# Altium PCB Controller_TRK_hv2.PcbDoc (part 1 of 2)
Units mm, origin at the board's own origin, x right, y up, seen from the top; angles counter-clockwise.
Board outline 95.06 x 95 mm, 2 copper layers (Top Layer, Bottom Layer); 179 components, 122 nets, 486 pads, 332 vias.
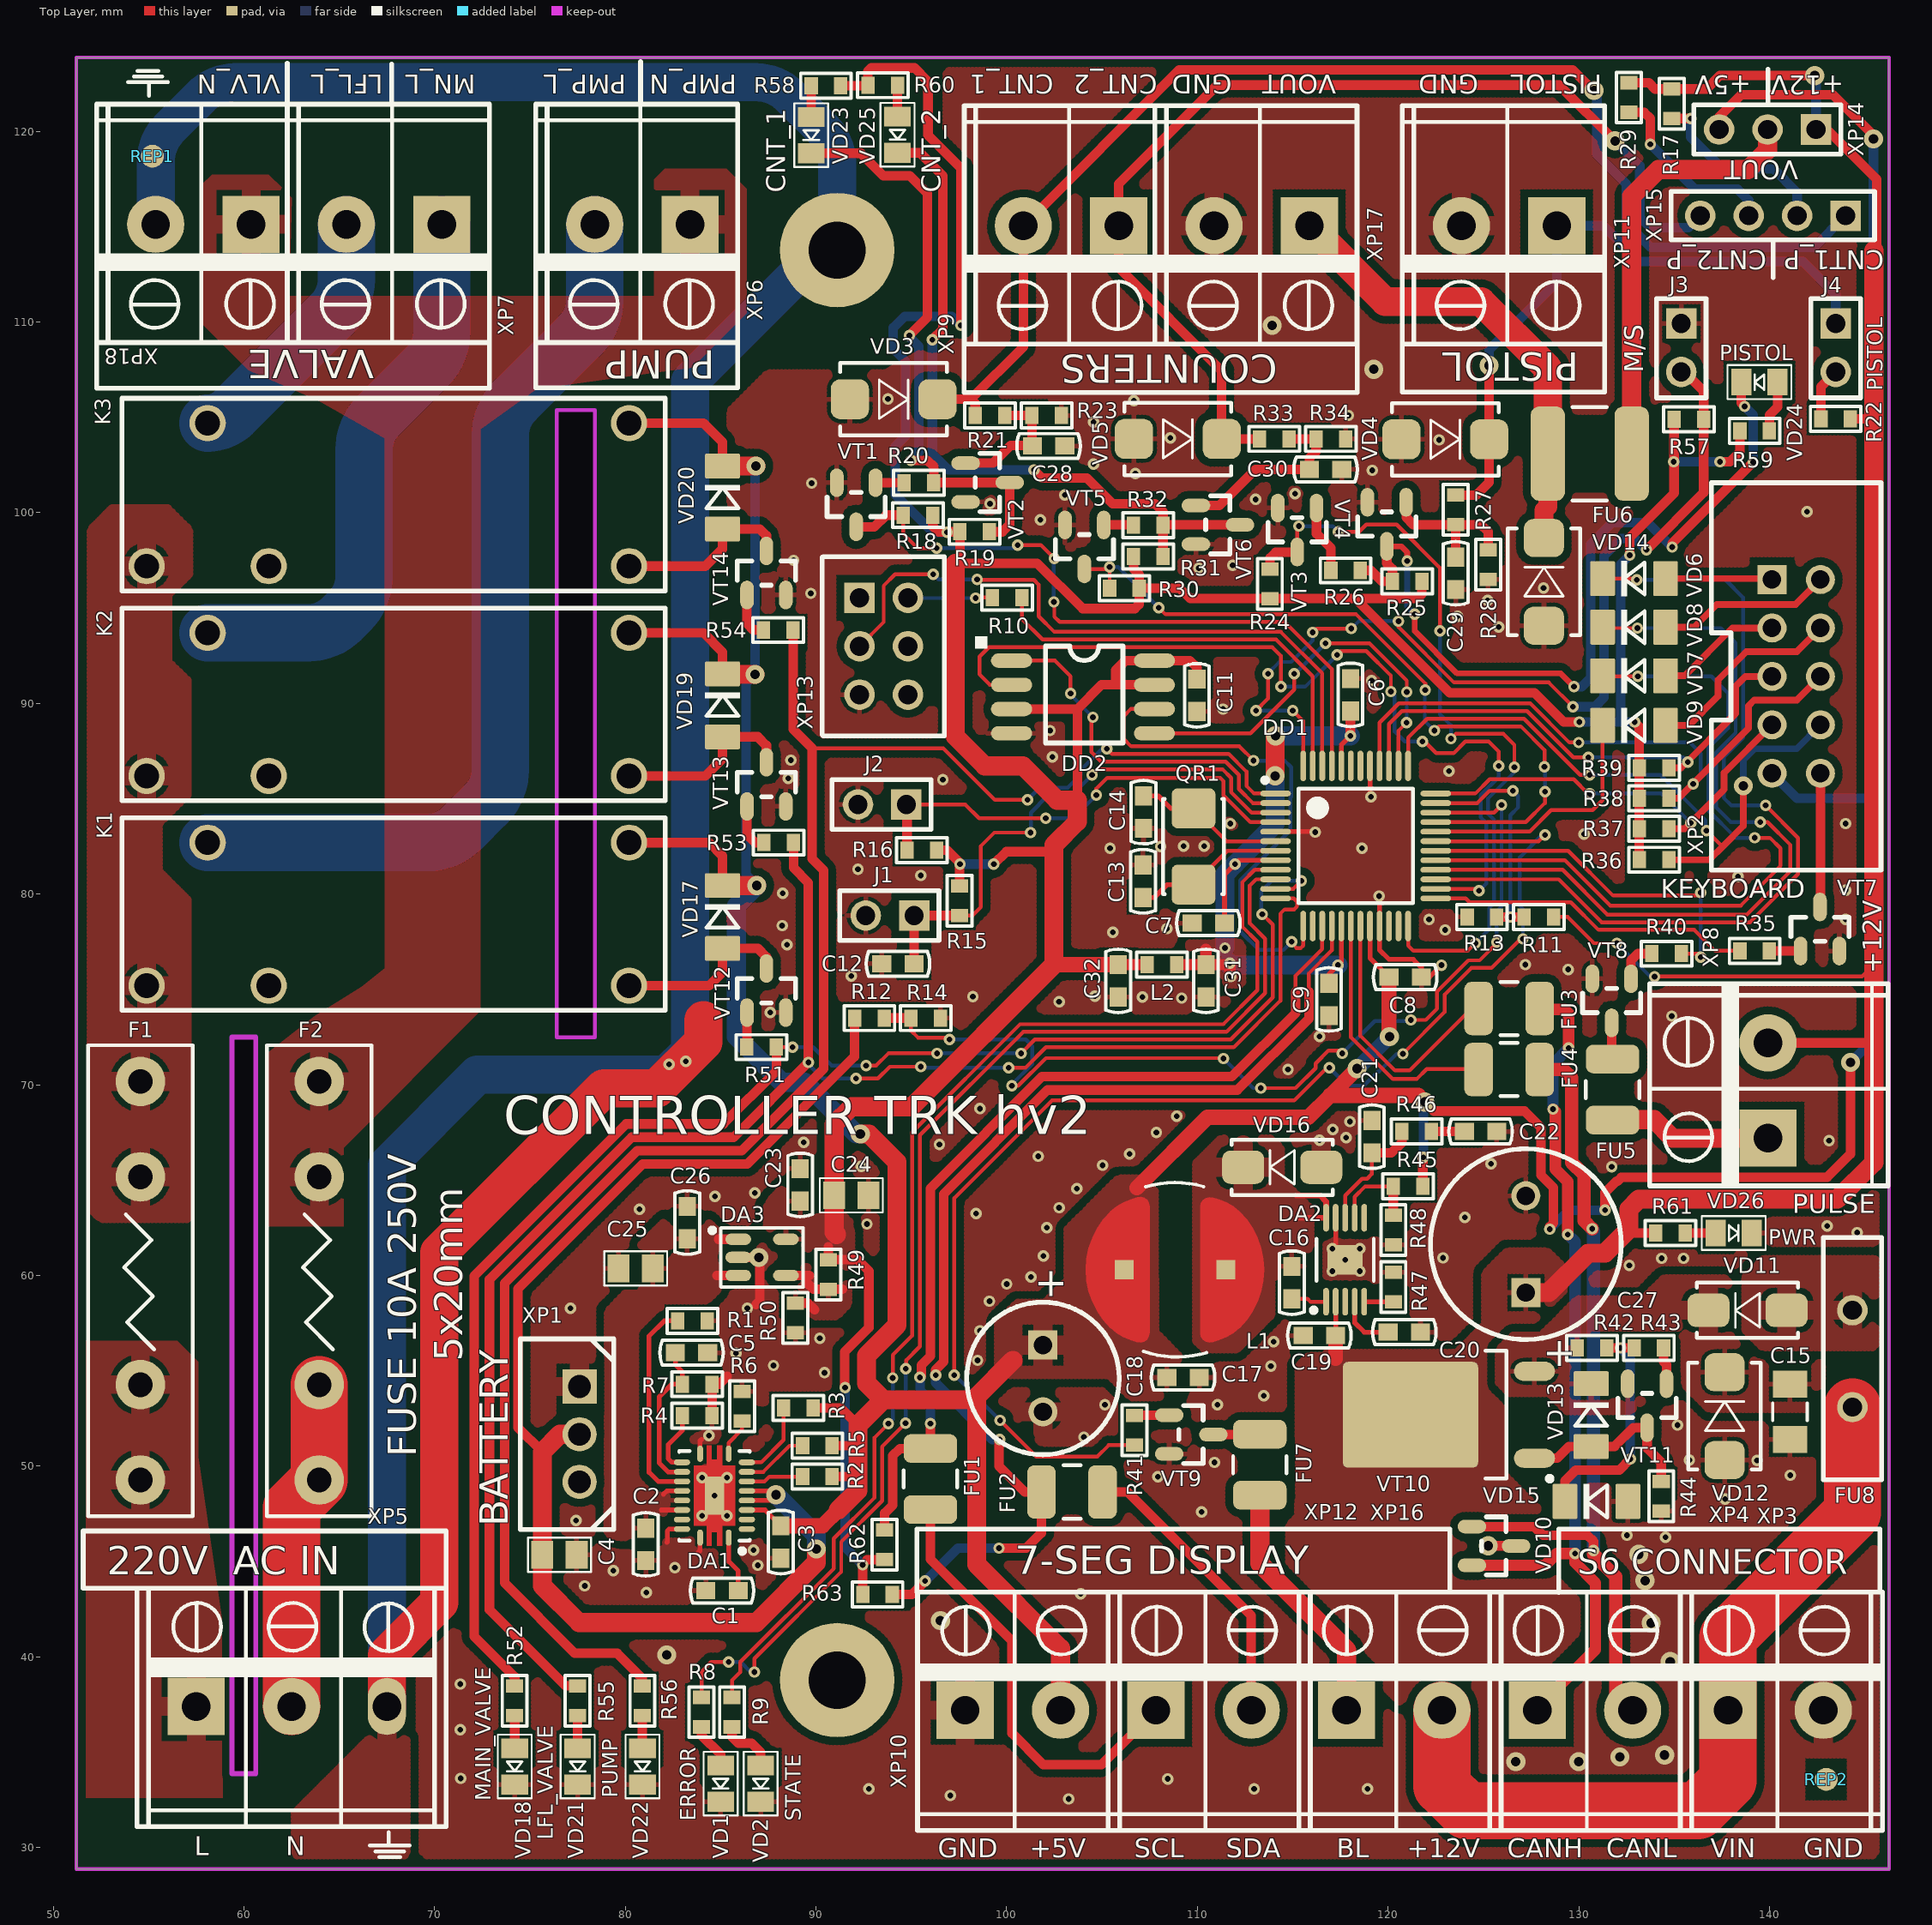
[diagram p0: Top Layer view]
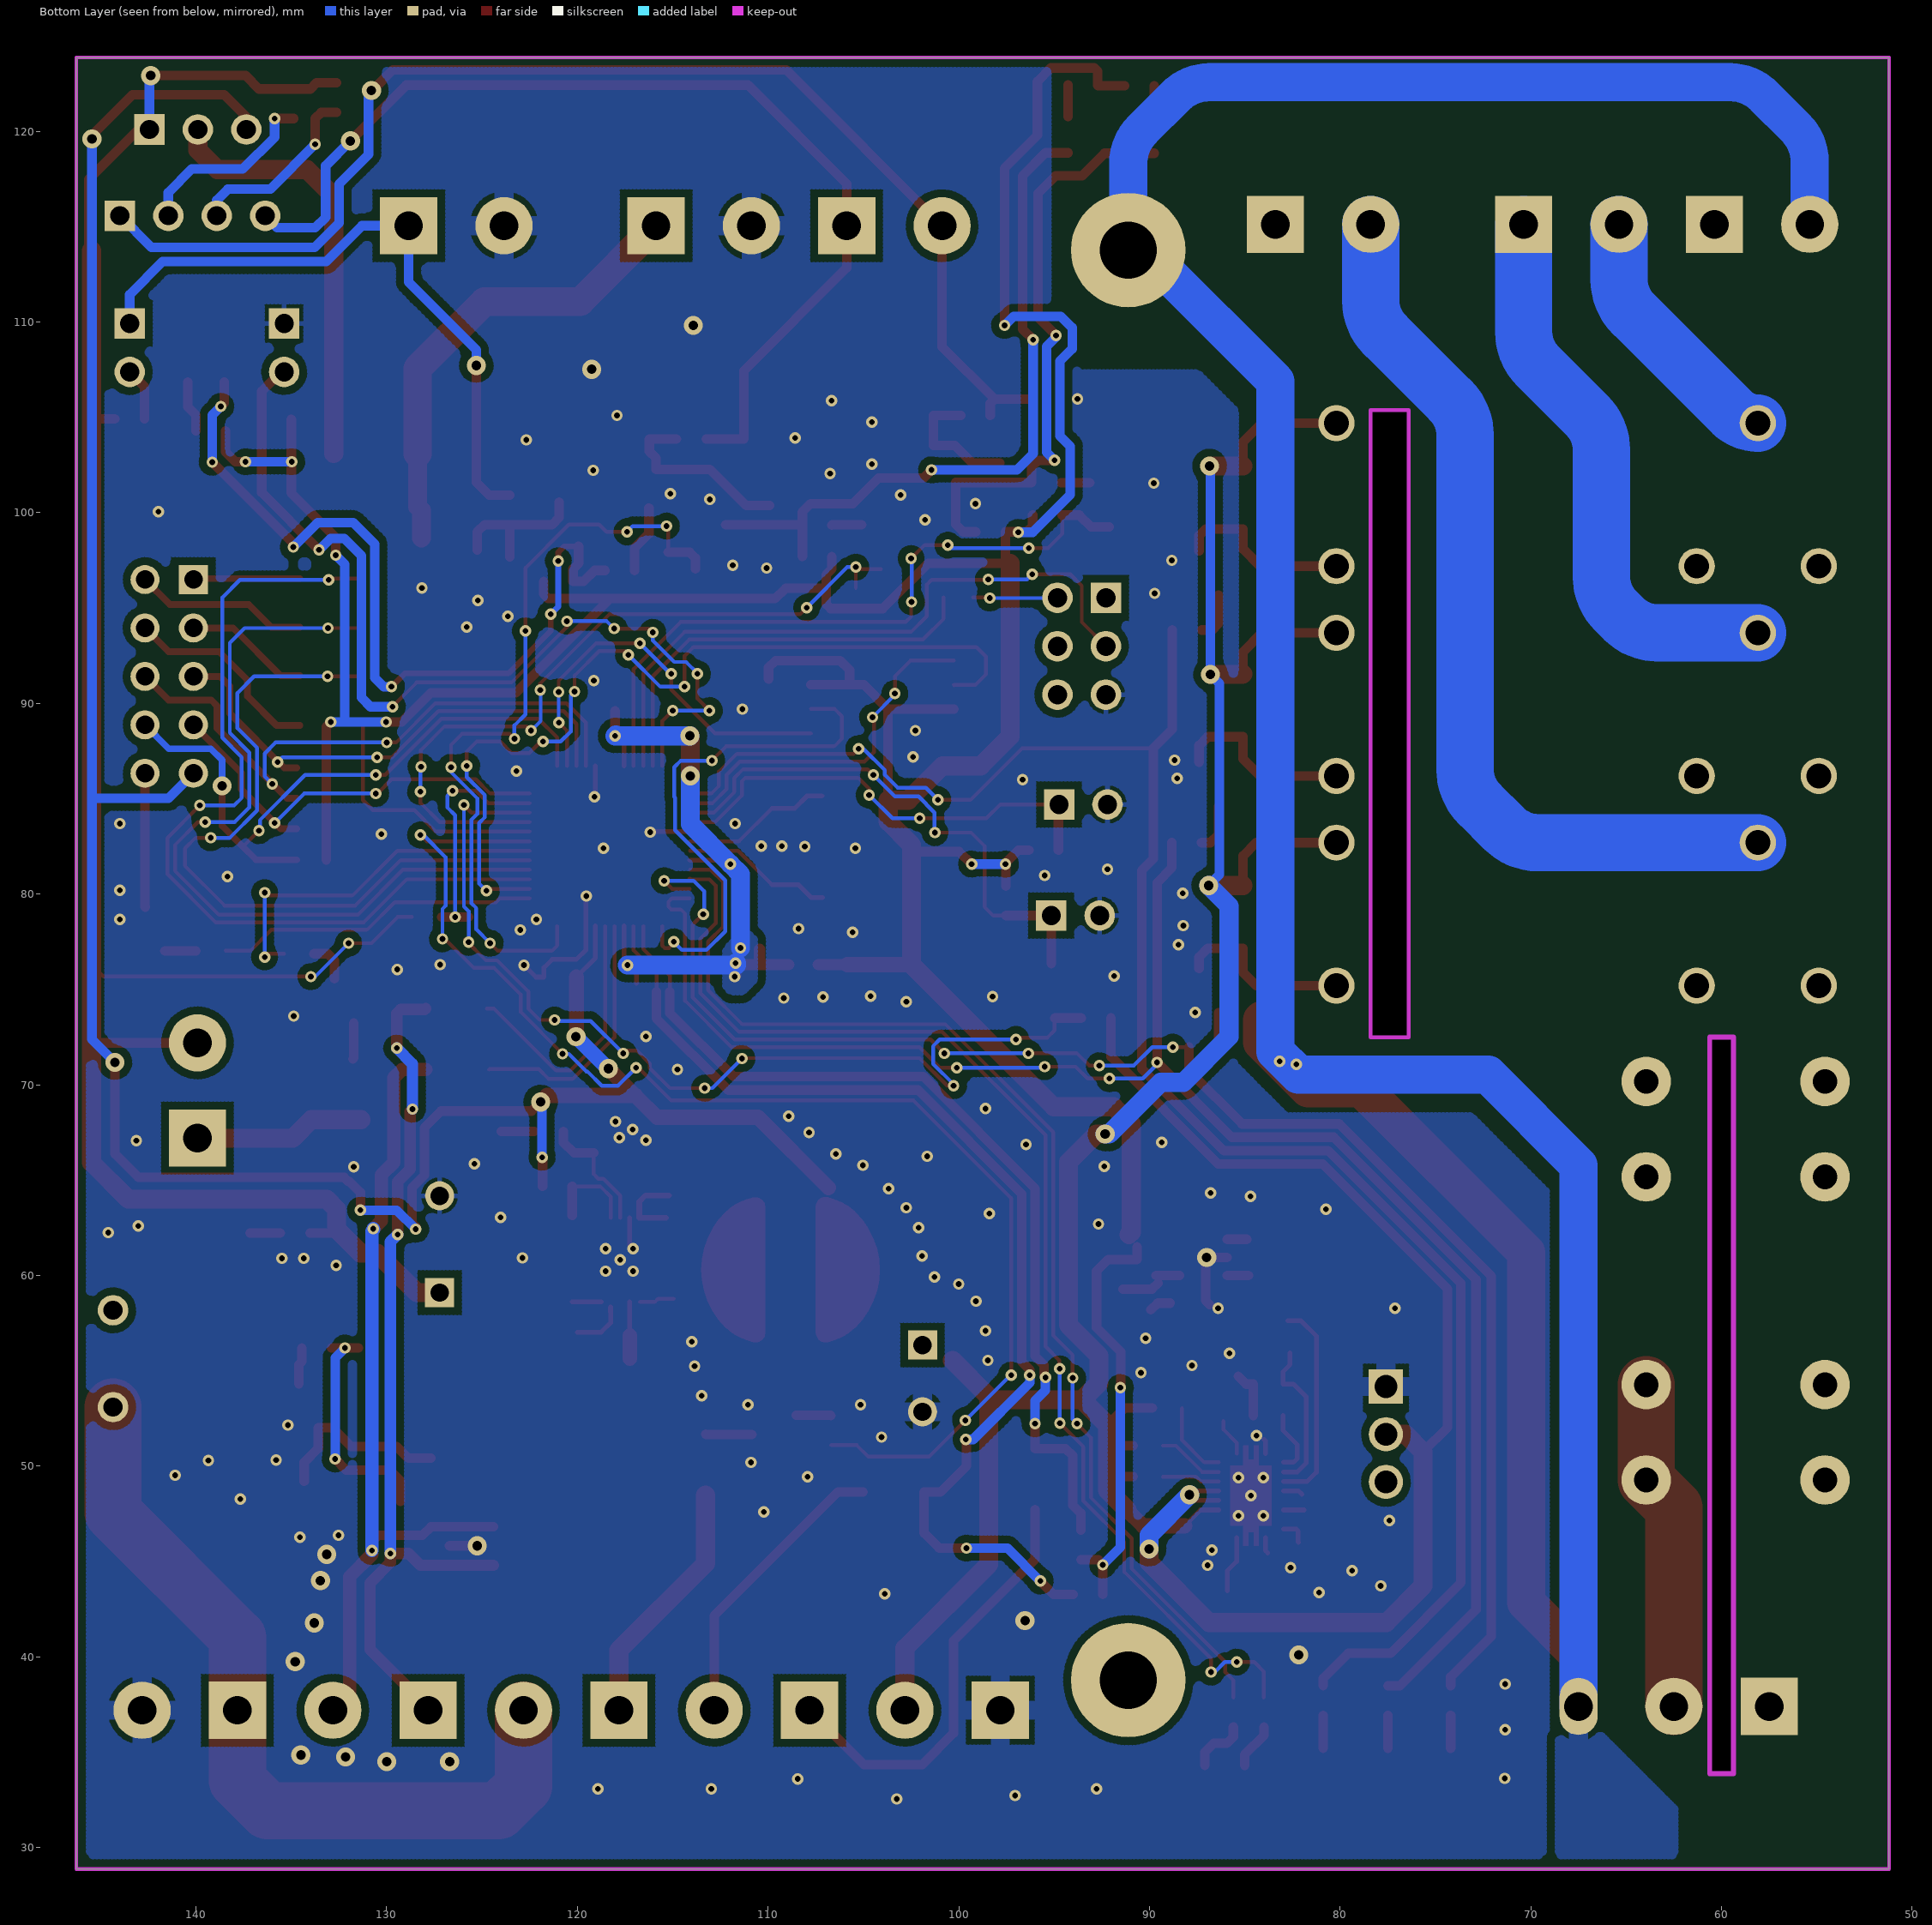
[diagram p1: Bottom Layer view, seen from below]

## Layer stack, top to bottom
Top Solder: solder mask 0.0102, Solder Resist, Dk 3.5
Top Layer: signal copper 0.0356
Dielectric 1: dielectric 0.32, FR-4, Dk 4.8
Bottom Layer: signal copper 0.0356
Bottom Solder: solder mask 0.0102, Solder Resist, Dk 3.5

## Board outline
51.213,28.877 51.213,123.877 146.275,123.877 146.275,28.877
cut-out: 76.4,105.375 78.4,105.375 78.4,72.5 76.4,72.5
cut-out: 59.375,33.875 60.625,33.875 60.625,72.5 59.375,72.5

## Design rules (kind name [scope] priority, off if disabled: settings)
Clearance Clearance_2 [InPolygon] p1: gap=0.4 ignorepadtopadclearanceinfootprint=FALSE
Clearance [All] p2: gap=0.2 ignorepadtopadclearanceinfootprint=FALSE
ComponentClearance [All] p1: gap=0.1 collisioncheckmode=3 verticalgap=2540 showdistances=TRUE
HoleSize [All] p1: absolutevalues=TRUE maxlimit=10 minlimit=0.2 maxpercent=80.000 minpercent=20.000
HoleToHoleClearance [All] p1: gap=0.2 allowstackedmicrovias=TRUE
MinimumSolderMaskSliver [All] p1: minsoldermaskwidth=0.05
PolygonConnect PolygonConnect_1 [IsVia OR InComponent('VT10') AND InNet('VIN_F') OR InComponent('DA1') AND InNet('GND') OR InComponent('DA2') AND InNet('GND')] p1: connectstyle=Direct reliefconductorwidth=0.254 reliefentries=4 polygonreliefangle="90 Angle" airgapwidth=0.254
PolygonConnect PolygonConnect_2 [InNet('L_IN') OR InNet('NetF1_2') OR InNet('EARTH') OR InComponent('C18') OR InComponent('VD16') OR InComponent('XP10') OR InComponent('XP3') OR InComponent('XP1') AND InNet('GND') OR InComponent('FU8') OR InComponent('VD11') OR InComponent('XP9') OR InComponent('XP11') OR InComponent('XP17') OR InComponent('XP5') OR InComponent('F2') OR InComponent('XP18') OR InComponent('XP6')] p2: connectstyle=Relief reliefconductorwidth=1 reliefentries=4 polygonreliefangle="90 Angle" airgapwidth=0.3
PolygonConnect [All] p3: connectstyle=Relief reliefconductorwidth=0.25 reliefentries=4 polygonreliefangle="90 Angle" airgapwidth=0.2
RoutingCorners [All] p1: cornerstyle=45-Degree minsetback=1 maxsetback=5
RoutingVias [All] p1: holewidth=0.4 width=0.8 viastyle="Through Hole" minholewidth=0.3 minwidth=0.6 maxholewidth=1 maxwidth=2
SilkToSilkClearance [All] p1: silktosilkclearance=0.1
SilkToSolderMaskClearance [IsPad] p1: minsilkscreentomaskgap=0.1 clearancetoexposedcopper=FALSE
SolderMaskExpansion [All] p1: expansion=0.102
Width [All] p1: maxlimit=5 minlimit=0.2 preferedwidth=0.5
23 further rules are at their usual default settings.

## Classes and differential pairs
component class Relay: F1 F2 K1 K2 K3 R51 R52 R53 R54 R55 R56 VD17 VD18 VD19 VD20 VD21 VD22 VT12 VT13 VT14
component class Power: C15 C16 C17 C18 C19 C20 C21 C22 C23 C24 C25 C26 C27 C31 C32 DA2 DA3 FU8 L1 L2 R42 R43 R44 R45 R46 R47 R48 R49 R50 R61 VD11 VD12 VD13 VD15 VD16 VD26 VT10 VT11
component class Output: FU3 FU4 FU5 FU6 FU7 R40 R41 VD10 VT8 VT9 XP14
component class Keyboard: R35 R36 R37 R38 R39 VD6 VD7 VD8 VD9 VT7
component class Input: C28 C29 C30 J4 R17 R18 R19 R20 R21 R22 R23 R24 R25 R26 R27 R28 R29 R30 R31 R32 R33 R34 R58 R59 R60 VD3 VD4 VD5 VD23 VD24 VD25 VT1 VT2 VT3 VT4 VT5 VT6 XP15
component class CPU: C6 C7 C8 C9 C11 C12 C13 C14 DD1 DD2 J1 J2 J3 QR1 R8 R9 R10 R11 R12 R13 R14 R15 R16 R57 REP1 REP2 VD1 VD2 XP13
component class Connections: FU1 FU2 R62 R63 VD14 XP2 XP3 XP4 XP5 XP6 XP7 XP8 XP9 XP10 XP11 XP12 XP16 XP17 XP18
component class Battery: C1 C2 C3 C4 C5 DA1 R1 R2 R3 R4 R5 R6 R7 XP1

## Components (designator, comment, footprint, x,y, rotation, side; value= is the part's Value field where it differs from the comment)
C1 "0.1uF" CC0603 85.075,43.475 r180 top
C2 "1uF" CC0603 81.075,45.9 r270 top
C3 "1uF" CC0603 88.15,46.025 r270 top
C4 "10uFx6.3V" CC0805 76.55,45.35 r180 top
C5 "10nF" CC0603 83.475,55.95 r0 top
C6 "0.1uF" CC0603 118.025,90.45 r90 top
C7 "0.1uF" CC0603 110.575,78.475 r0 top
C8 "0.1uF" CC0603 120.9,75.65 r180 top
C9 "0.1uF" CC0603 116.9,74.475 r90 top
C11 "0.1uF" CC0603 109.975,90.425 r90 top
C12 "220pF" CC0603 94.3,76.35 r0 top
C13 "22pF" CC0603 107.15,80.675 r270 top
C14 "22pF" CC0603 107.175,84.3 r90 top
C15 "0.1uFx250V" CC1206 141.075,52.85 r90 top
C16 "0.1 uF" CC0603 114.95,59.625 r270 top
C17 "0.1 uF" CC0603 109.25,54.65 r0 top
C18 "1000uFx6.3V" CC8X3.5 101.9,56.35 r270 top
C19 "0.1 uF" CC0603 116.4,56.85 r180 top
C20 "10 nF" CC0603 120.85,57.025 r0 top
C21 "330pF" CC0603 119.15,67.275 r90 top
C22 "560pF" CC0603 124.85,67.55 r0 top
C23 "0.1uF" CC0603 89.175,64.75 r90 top
C24 "10uFx6.3V" CC0805 91.85,64.2 r180 top
C25 "10uF 6.3V" CC0805 80.55,60.375 r0 top
C26 "0.1uF" CC0603 83.25,62.775 r90 top
C27 "220uFx35V" CC16X10_CAP0.5(1)(Primary) 127.225,59.1 r90 top
C28 "200pF" CC0603 102.2,103.5 r180 top
C29 "0.1uF" CC0603 123.55,96.825 r90 top
C30 "200pF" CC0603 116.725,102.275 r180 top
C31 "10nF" CC0603 110.45,75.45 r90 top
C32 "10nF" CC0603 105.85,75.45 r90 top
DA1 "BQ24070" P-PQFP-N20 84.675,48.45 r90 top
DA2 "TPS54260DGQ" S-PDSO-G10 116.75,58.625 r90 top
DA3 "AP2210K-ADJTRG1" SOT23-5 87.175,60.95 r0 top
DD1 "LPC11C24FBD48" LQFP48 118.3,82.525 r0 top
DD2 "M25PE16-VMW" EIAJ_SO8 100.257,92.245 r0 top
F1 "KLS5-266(5x20) 2pcs" Fuse_5x20 54.575,49.275 r90 top
F2 "KLS5-266(5x20) 2pcs" Fuse_5x20 63.95,49.275 r90 top
FU1 "MICROSMD010F-2" RC1210 96,49.325 r90 top
FU2 "MICROSMD010F-2" RC1210 103.425,48.65 r180 top
FU3 "MICROSMD010F-2" RC1210 126.35,74 r0 top
FU4 "MICROSMD010F-2" RC1210 126.35,70.8 r0 top
FU5 "MICROSMD010F-2" RC1210 131.775,69.75 r270 top
FU6 "MF-SMDF050" MF-SMDF 130.575,103.1 r180 top
FU7 "MICROSMD010F-2" RC1210 113.275,50.075 r270 top
FU8 "RXE-110" RXE-110 144.35,53.095 r90 top
J1 "PLS-02" PLS-02 95.15,78.875 r180 top
J2 "PLS-02" PLS-02 94.74,84.7 r180 top
J3 "PLS-02" PLS-02 135.375,109.925 r270 top
J4 "PLS-02" PLS-02 143.475,109.925 r270 top
K1 "RY21" RY21_RY21(Primary) 80.2,75.2 r180 top
K2 "RY21" RY21_RY21(Primary) 80.2,86.2 r180 top
K3 "RY21" RY21_RY21(Primary) 80.2,97.2 r180 top
L1 "15uH" SDR0805 108.825,60.3 r180 top
L2 "L0603" L0603 107.376,76.3 r0 top value=LQM18FN1R0M00D
QR1 "NX5032GA-12.000MHz LN-CD-1" AC5032_2 109.8,82.5 r270 top
R1 "51k" RC0603 83.525,57.625 r0 top
R2 "100k" RC0603 90.075,49.45 r0 top
R3 "100k" RC0603 89.075,53.05 r0 top
R4 "10k" RC0603 83.775,52.65 r0 top
R5 "100k" RC0603 90.075,51.075 r0 top
R6 "2k" RC0603 86.125,53.15 r90 top
R7 "36k" RC0603 83.775,54.3 r0 top
R8 "1k" RC0603 84,37.1 r90 top
R9 "1k" RC0603 85.6,37.1 r90 top
R10 "100E" RC0603 100.025,95.55 r180 top
R11 "100k" RC0603 127.9,78.8 r0 top
R12 "10k" RC0603 92.799,73.5 r180 top
R13 "10k" RC0603 124.925,78.8 r0 top
R14 "10k" RC0603 95.749,73.5 r180 top
R15 "10k" RC0603 97.525,79.65 r270 top
R16 "10k" RC0603 95.55,82.3 r180 top
R17 "10k" RC0603 134.875,121.45 r90 top
R18 "1k" RC0603 95.35,99.875 r0 top
R19 "10k" RC0603 98.325,99 r180 top
R20 "1k" RC0603 95.4,101.575 r180 top
R21 "33k" RC0603 99.125,105.1 r0 top
R22 "10k" RC0603 143.475,104.925 r0 top
R23 "100k" RC0603 102.1,105.1 r180 top
R24 "1k" RC0603 113.8,96.275 r270 top
R25 "10k" RC0603 121,96.4 r0 top
R26 "1k" RC0603 117.775,96.975 r180 top
R27 "33k" RC0603 123.55,100.15 r270 top
R28 "100k" RC0603 125.25,97.275 r90 top
R29 "10k" RC0603 132.625,121.775 r90 top
R30 "1k" RC0603 106.175,96.05 r0 top
R31 "10k" RC0603 107.425,97.7 r180 top
R32 "1k" RC0603 107.425,99.35 r180 top
R33 "33k" RC0603 114.025,103.875 r0 top
R34 "100k" RC0603 117,103.875 r180 top
R35 "4k7" RC0603 139.225,77.025 r0 top
R36 "3k" RC0603 133.95,81.8 r0 top
R37 "3k" RC0603 133.95,83.425 r0 top
R38 "3k" RC0603 133.95,85.025 r0 top
R39 "3k" RC0603 133.95,86.625 r0 top
R40 "4k7" RC0603 134.6,76.875 r180 top
R41 "4k7" RC0603 106.7,51.875 r90 top
R42 "220k" RC0603 130.7,56.2 r180 top
R43 "220k" RC0603 133.675,56.2 r180 top
R44 "220k" RC0603 134.325,48.425 r90 top
R45 "68k1 1%" RC0603 121.05,64.675 r0 top
R46 "12k" RC0603 121.5,67.55 r180 top
R47 "240k" RC0603 120.275,59.4 r270 top
R48 "13k 1%" RC0603 120.275,62.375 r90 top
R49 "11k 1%" RC0603 90.65,60.05 r90 top
R50 "18k 1%" RC0603 88.925,57.775 r90 top
R51 "4k7" RC0603 87.15,71.975 r180 top
R52 "1k" RC0603 74.2,37.7 r270 top
R53 "4k7" RC0603 88.049,82.7 r180 top
R54 "4k7" RC0603 88.025,93.85 r180 top
R55 "1k" RC0603 77.5,37.7 r270 top
R56 "1k" RC0603 80.9,37.7 r270 top
R57 "10k" RC0603 135.775,104.9 r0 top
R58 "1k" RC0603 90.525,122.4 r0 top
R59 "1k" RC0603 139.225,104.3 r180 top
R60 "1k" RC0603 93.5,122.425 r180 top
R61 "2k2" RC0603 134.8,62.225 r0 top
R62 "2k2" RC0603 93.6,45.875 r270 top
R63 "2k2" RC0603 93.225,43.275 r180 top
REP1 "REPER_POINT_1.2" REPER1.2 55.2,118.7 r90 top
REP2 "REPER_POINT_1.2" REPER1.2 142.975,33.575 r90 top
VD1 "LED_0805" LED0805 85,34.3 r270 top
VD2 "LED_0805" LED0805 87.1,34.3 r270 top
VD3 "SMBJ15A" SMB 94.075,105.95 r180 top
VD4 "SMBJ15A" SMB 123,103.85 r180 top
VD5 "SMBJ15A" SMB 108.975,103.875 r180 top
VD6 "LL4148" SOD-80 132.9,96.55 r0 top
VD7 "LL4148" SOD-80 132.9,91.45 r0 top
VD8 "LL4148" SOD-80 132.9,94 r0 top
VD9 "LL4148" SOD-80 132.9,88.85 r0 top
VD10 "PESD2CAN" SOT-23(123) 124.387,46.832 r180 top
VD11 "GS1M" SMA 138.85,58.175 r180 top value={Value}
VD12 "SMBJ150A" SMB 137.65,52.625 r270 top
VD13 "BZV55C15" SOD-80 130.65,52.675 r270 top
VD14 "SMBJ15A" SMB 128.175,96.375 r270 top
VD15 "BZV55C39" SOD-80 130.925,48.15 r0 top
VD16 "SK34SMA" SMA 114.45,65.675 r180 top value={Value}
VD17 "LL4148" SOD-80 85.1,78.8 r270 top
VD18 "LED_0805" LED0805 74.2,35.2 r270 top
VD19 "LL4148" SOD-80 85.1,89.9 r270 top
VD20 "LL4148" SOD-80 85.1,100.8 r270 top
VD21 "LED_0805" LED0805 77.5,35.2 r270 top
VD22 "LED_0805" LED0805 80.9,35.2 r270 top
VD23 "LED_0805" LED0805 89.75,120.75 r270 top
VD24 "LED_0805" LED0805 140.425,106.85 r180 top
VD25 "LED_0805" LED0805 94.275,120.775 r270 top
VD26 "LED_0805" LED0805 137.175,62.225 r0 top
VT1 "BC817-40" SOT-23(123) 93.125,101.588 r90 top
VT2 "BC817-40" SOT-23(123) 97.837,102.6 r180 top
VT3 "BC817-40" SOT-23(123) 116.25,100.263 r90 top
VT4 "BC817-40" SOT-23(123) 120.95,100.563 r90 top
VT5 "BC817-40" SOT-23(123) 105.091,99.374 r90 top
VT6 "BC817-40" SOT-23(123) 109.912,100.382 r180 top
VT7 "BC817-40" SOT-23(123) 141.634,77.001 r270 top
VT8 "BC817-40" SOT-23(123) 132.741,75.574 r90 top
VT9 "BC817-40" SOT-23(123) 108.512,52.675 r180 top
VT10 "IRFR9220" D-PAK(TO-252AA) 123.175,52.695 r180 top
VT11 "BC857" SOT-23(123) 134.6,54.338 r90 top
VT12 "BC817-40" SOT-23(123) 86.384,73.776 r270 top
VT13 "BC817-40" SOT-23(123) 86.384,84.587 r270 top
VT14 "BC817-40" SOT-23(123) 86.384,95.676 r270 top
XP1 "MW03D" MW03D 77.6,54.175 r270 top
XP2 "BH-10" BH-10 140.135,96.495 r270 top
XP3 "DG330-2PIN" DG330-2PIN 140.425,37.175 r0 top
XP4 "DG330-2PIN" DG330-2PIN 130.425,37.175 r0 top
XP5 "DG330-3PIN" DG330-3PIN 62.5,37.4 r0 top
XP6 "DG330-2PIN" DG330-2PIN 80.8,115.15 r180 top
XP7 "DG330-2PIN" DG330-2PIN 67.775,115.15 r180 top
XP8 "DG330-2PIN" DG330-2PIN 139.95,69.8 r90 top
XP9 "DG330-2PIN" DG330-2PIN 103.275,115.075 r180 top
XP10 "DG330-2PIN" DG330-2PIN 100.425,37.175 r0 top
XP11 "DG330-2PIN" DG330-2PIN 126.25,115.075 r180 top
XP12 "DG330-2PIN" DG330-2PIN 110.425,37.175 r0 top
XP13 "PLD-06" PIN6 92.285,95.54 r270 top
XP14 "PLS03" PLS-03 142.44,120.1 r180 top
XP15 "PLS04" PIN04S 143.99,115.575 r180 top
XP16 "DG330-2PIN" DG330-2PIN 120.425,37.175 r0 top
XP17 "DG330-2PIN" DG330-2PIN 113.275,115.075 r180 top
XP18 "DG330-2PIN" DG330-2PIN 57.775,115.15 r180 top

## Footprints (in the part's own frame and the unit in brackets; to place one, negate y for a bottom-side part, rotate by r counter-clockwise, add the part's x,y. Pads: shape width x height; smd on the part's side, far side on the other; paste and mask are expansions set on the pad)
AC5032_2 [mm]
  rrect30% 2.1x2.3 smd mask+0.05: 1(-2,0) 2(2,0)
  silkscreen extent -2.5,-1.6 2.5,1.6
BH-10 [mil]
  rect 60x60 hole 38 mask+1.97: 1(0,0)
  round 60 hole 38 mask+1.97: 2(0,100) 3(100,0) 4(100,100) 5(200,0) 6(200,100) 7(300,0) 8(300,100) 9(400,0) 10(400,100)
  silkscreen extent -200,-125 600,225
CC8X3.5 [mil]
  rect 60x60 hole 38 mask+1.97: 1(0,0)
  round 60 hole 38 mask+1.97: 2(137.8,0)
  silkscreen extent -89,-157 226,157
CC16X10_CAP0.5(1)(Primary) [mil]
  round 60 hole 38 mask+1.97: 1(200,0)
  rect 60x60 hole 38 mask+1.97: 2(0,0)
  silkscreen extent -97,-197 297,197
CC0603 [mm]
  rect 1x0.9 smd paste-25.4 mask+0.05: 1(-0.85,0) 2(0.85,0)
  silkscreen extent -1.66,-0.65 1.66,0.65
CC0805 [mm]
  rect 1.15x1.45 smd paste-25.4 mask+0.05: 1(-0.9,0) 2(0.9,0)
  silkscreen extent -1.65,-0.9 1.65,0.9
CC1206 [mm]
  rect 1.4x1.8 smd paste-25.4 mask+0.05: 1(-1.45,0) 2(1.45,0)
  silkscreen extent -0.45,-0.9 0.45,0.9
D-PAK(TO-252AA) [mm]
  oval 2.15x1 smd paste+0.076 mask+0.05: 1(-4.5,2.28) 3(-4.5,-2.28)
  rrect10% 7.1x5.55 smd paste-4 mask+0.05: 2(2,0)
  silkscreen extent -5.42,-3.35 -1.92,3.47
DG330-2PIN [mm]
  rect 3x3 hole 1.5 mask+0.05: 1(-2.6,0.025)
  round 3 hole 1.5 mask+0.05: 2(2.4,0.025)
  silkscreen extent -5.1,-6.27 5.6,6.23
DG330-3PIN [mm]
  rect 3x3 hole 1.5 mask+0.05: 1(-5,0)
  round 3 hole 1.5 mask+0.05: 2(0,0)
  oval 2x3 hole 1.5 mask+0.05: 3(5,0)
  silkscreen extent -8.1,-6.3 8.1,6.2
EIAJ_SO8 [mil]
  oval 85x29.53 smd mask+1.97: 1(0,0) 2(0,-50) 3(0,-100) 4(0,-150) 5(295,-150) 6(295,-100) 7(295,-50) 8(295,0)
  silkscreen extent -75,-170 230,50
Fuse_5x20 [mm]
  round 2.6 hole 1.3 mask+0.05: 1(0,0) 1(5,0) 2(15.9,0) 2(20.9,0)
  silkscreen extent -1.9,-2.75 22.8,2.75
L0603 [mm]
  rect 0.7x0.9 smd paste-25.4 mask+0.05: 1(0,0) 2(1.549,0)
  silkscreen extent -0.55,-0.65 2.1,0.65
LED0805 [mm]
  rect 1.05x1.4 smd paste-25.4 mask+0.05: 1(0,0) 2(1.9,0)
  silkscreen extent -0.72,-0.89 2.62,0.89
LQFP48 [mm]
  oval 1.6x0.3 smd mask+0.05: 1(-4.2,2.75) 2(-4.2,2.25) 3(-4.2,1.75) 4(-4.2,1.25) 5(-4.2,0.75) 6(-4.2,0.25) 7(-4.2,-0.25) 8(-4.2,-0.75) 9(-4.2,-1.25) 10(-4.2,-1.75) 11(-4.2,-2.25) 12(-4.2,-2.75) 25(4.2,-2.75) 26(4.2,-2.25) 27(4.2,-1.75) 28(4.2,-1.25) 29(4.2,-0.75) 30(4.2,-0.25) 31(4.2,0.25) 32(4.2,0.75) 33(4.2,1.25) 34(4.2,1.75) 35(4.2,2.25) 36(4.2,2.75)
  oval 0.3x1.6 smd mask+0.05: 13(-2.75,-4.2) 14(-2.25,-4.2) 15(-1.75,-4.2) 16(-1.25,-4.2) 17(-0.75,-4.2) 18(-0.25,-4.2) 19(0.25,-4.2) 20(0.75,-4.2) 21(1.25,-4.2) 22(1.75,-4.2) 23(2.25,-4.2) 24(2.75,-4.2) 37(2.75,4.2) 38(2.25,4.2) 39(1.75,4.2) 40(1.25,4.2) 41(0.75,4.2) 42(0.25,4.2) 43(-0.25,4.2) 44(-0.75,4.2) 45(-1.25,4.2) 46(-1.75,4.2) 47(-2.25,4.2) 48(-2.75,4.2)
  silkscreen extent -4.87,-3 3,3.57
MF-SMDF [mm]
  rrect50% 1.8x4.95 smd mask+0.05: 1(-2.2,0) 2(2.2,0)
  silkscreen extent -0.9,-2.45 0.9,2.45
MW03D [mm]
  rect 1.8x1.8 hole 1.2 mask+0.05: 1(0,0)
  round 1.8 hole 1.2 mask+0.05: 2(2.5,0) 3(5,0)
  silkscreen extent -2.5,-3.1 7.5,1.8
P-PQFP-N20 [mm]
  oval 0.85x0.3 smd mask+0.05: 1(-2.2,-0.75) 10(2.2,-0.75) 11(2.2,0.75) 20(-2.2,0.75)
  oval 0.3x0.85 smd mask+0.05: 2(-1.75,-1.7) 3(-1.25,-1.7) 4(-0.75,-1.7) 5(-0.25,-1.7) 6(0.25,-1.7) 7(0.75,-1.7) 8(1.25,-1.7) 9(1.75,-1.7) 12(1.75,1.7) 13(1.25,1.7) 14(0.75,1.7) 15(0.25,1.7) 16(-0.25,1.7) 17(-0.75,1.7) 18(-1.25,1.7) 19(-1.75,1.7)
  rect 2x1 smd paste-25.4 mask+0.05: 21(0,0)
  Top Layer region: -1.575,-1.075 1.575,-1.075 1.575,-0.4 2.625,-0.4 2.625,-0.15 1.9,-0.15 1.9,0.15 2.625,0.15 2.625,0.4 1.575,0.4 1.575,1.075 -1.575,1.075 -1.575,0.4 -2.625,0.4 -2.625,0.15 -1.9,0.15 -1.9,-0.15 -2.625,-0.15 -2.625,-0.4 -1.575,-0.4
  silkscreen extent -3.02,-1.85 2.35,1.85
PIN04S [mm]
  rect 1.6x1.6 hole 1 mask+0.05: 1(0,0)
  round 1.6 hole 1 mask+0.05: 2(2.54,0) 3(5.08,0) 4(7.62,0)
  silkscreen extent -1.52,-1.27 9.14,1.27
PIN6 [mm]
  rect 1.6x1.6 hole 1 mask+0.05: 1(0,0)
  round 1.6 hole 1 mask+0.05: 2(0,2.54) 3(2.54,0) 4(2.54,2.54) 5(5.08,0) 6(5.08,2.54)
  silkscreen extent -2.16,-1.96 7.24,4.45
PLS-02 [mm]
  rect 1.6x1.6 hole 1 mask+0.05: 1(0,0)
  round 1.6 hole 1 mask+0.05: 2(2.54,0)
  silkscreen extent -1.3,-1.3 3.9,1.3
PLS-03 [mm]
  rect 1.6x1.6 hole 1 mask+0.05: 1(0,0)
  round 1.6 hole 1 mask+0.05: 2(2.54,0) 3(5.08,0)
  silkscreen extent -1.3,-1.3 6.4,1.3
RC0603 [mm]
  rect 0.7x0.9 smd paste-25.4 mask+0.05: 1(-0.775,0) 2(0.774,0)
  silkscreen extent -1.32,-0.65 1.33,0.65
RC1210 [mm]
  rrect50% 1.5x2.8 smd mask+0.05: 1(-1.6,0) 2(1.6,0)
  silkscreen extent -0.45,-1.4 0.45,1.4
REPER1.2 [mm]
  round 1.2 smd paste-25.4 mask+0.05: 1(0,0)
  Top Layer pour cut-out: -1.35,-1.325 1.325,-1.325 1.325,1.325 -1.35,1.325
RXE-110 [mm]
  round 1.6 hole 1 mask+0.05: 1(0,0) 2(5.08,0)
  silkscreen extent -3.81,-1.52 8.89,1.52
RY21_RY21(Primary) [mm]
  round 1.9 hole 1.3 mask+0.05: 1(0,-7.5) 2(0,0) 11(22.1,-7.5) 12(18.9,0) 14(25.3,0)
  silkscreen extent -1.9,-8.8 26.6,1.3
S-PDSO-G10 [mm]
  oval 1.45x0.3 smd mask+0.05: 1(0,0) 2(0,-0.5) 3(0,-1) 4(0,-1.5) 5(0,-2) 6(4.4,-2) 7(4.4,-1.5) 8(4.4,-1) 9(4.4,-0.5) 10(4.4,0)
  rect 1.55x1.85 smd mask+0.05: 11(2.2,-1)
  silkscreen extent -0.57,-2.5 3.3,0.77
SDR0805 [mm]
  rect 1x1 smd paste-25.4 mask+0.05: 1(-2.667,0) 2(2.667,0)
  Top Layer region: -1.327,3.319 -1.362,3.503 -1.461,3.66 -1.612,3.771 -1.792,3.818 -1.977,3.797 -2.318,3.69 -2.706,3.535 -3.065,3.321 -3.387,3.053 -3.392,3.047 -3.771,2.627 -4.09,2.16 -4.345,1.654 -4.53,1.119 -4.642,0.565 -4.68,0 -4.642,-0.565 -4.53,-1.119 -4.345,-1.654 -4.09,-2.16 -3.771,-2.627 -3.392,-3.047 -3.381,-3.059 -3.063,-3.323 -2.709,-3.534 -2.325,-3.688 -1.996,-3.791 -1.806,-3.813 -1.62,-3.764 -1.465,-3.65 -1.363,-3.488 -1.327,-3.299
  Top Layer region: 1.327,-3.319 1.362,-3.503 1.461,-3.66 1.612,-3.771 1.792,-3.818 1.977,-3.797 2.318,-3.69 2.706,-3.535 3.065,-3.321 3.387,-3.053 3.392,-3.047 3.771,-2.627 4.09,-2.16 4.345,-1.654 4.53,-1.119 4.642,-0.565 4.68,0 4.642,0.565 4.53,1.119 4.345,1.654 4.09,2.16 3.771,2.627 3.392,3.047 3.381,3.059 3.063,3.323 2.709,3.534 2.325,3.688 1.996,3.791 1.806,3.813 1.62,3.764 1.465,3.65 1.363,3.488 1.327,3.299
  silkscreen extent -1.66,-4.57 1.64,4.57
SMA [mm]
  rrect50% 2.2x1.75 smd mask+0.05: 1(-2.05,0) 2(2.05,0)
  silkscreen extent -2.65,-1.45 2.65,1.45
SMB [mm]
  rrect50% 2x2.1 smd mask+0.05: 1(2.3,0) 2(-2.3,0)
  silkscreen extent -2.8,-1.9 2.8,1.9
SOD-80 [mm]
  rrect10% 1.3x1.83 smd paste-25.4 mask+0.05: 1(1.651,0) 2(-1.651,0)
  silkscreen extent -0.66,-0.91 0.56,0.91
SOT23-5 [mm]
  oval 1.35x0.6 smd mask+0.05: 1(-1.25,0.95) 2(-1.25,0) 3(-1.25,-0.95) 4(1.25,-0.95) 5(1.25,0.95)
  silkscreen extent -2.74,-1.55 2.16,1.55
SOT-23(123) [mil]
  oval 59.06x28.07 smd mask+1.97: 1(-0.5,0) 2(-0.5,80) 3(-91.5,40)
  silkscreen extent -71,-20 -21,100

## Part data
C1 C2 C3 C5 C6 C7 C8 C9 C11 C12 C13 C14 C16 C17 C19 C20 C21 C22 C23 C26 C28 C29 C30 C31 C32: library part CC0603, "CC0603"
C4 C24 C25: library part CC0805, "CC0805"
C15: library part CC1206, "CC1206"
C18: library part CAP0.35, "CAP0.35"
C27: library part CAP0.5(1), "CAP0.5(1)"
DA3: library part MCP1824T-ADJE/OT, "300 mA, Low Voltage, Low Quiescent Current LDO Regulator, 5-Pin SOT-223, Extended Temperature, Tape and Reel", ComponentLink1Description="Manufacturer Link", ComponentLink1URL=http://www.microchip.com, ComponentLink2Description=Datasheet, ComponentLink2URL=http://ww1.microchip.com/downloads/en/DeviceDoc/22070a.pdf, ComponentLink3Description="Packaging Specification", ComponentLink3URL=http://ww1.microchip.com/downloads/en/PackagingSpec/00049AW.pdf, DatasheetVersion="revA, Aug-2007", PackageDescription="5-Lead Plastic Small Outline Transistor (DC) [SOT-223]", PackageReference=SOT-223-DC5, PackageVersion="revAW, Oct-2008", Published=29-Jan-2009, Publisher="Altium Limited"
DD2: library part S25FL016A0LMFI01, "S25FL016A0LMFI01"
F1 F2: library part "Fuse KLS5-266(5x20)"
FU1 FU2 FU3 FU4 FU5 FU7: library part MICROSMD, "MICROSMD"
FU6: library part MF-SMDF, "MF-SMDF"
L1: library part SDR0805, "SDR0805"
QR1: library part AC5032_2, "AC5032/2"
R1 R2 R3 R4 R5 R6 R7 R8 R9 R10 R11 R12 R13 R14 R15 R16 R17 R18 R19 R20 R21 R22 R23 R24 R25 R26 R27 R28 R29 R30 R31 R32 R33 R34 R35 R36 R37 R38 R39 R40 R41 R42 R43 R44 R45 R46 R47 R48 R49 R50 R51 R52 R53 R54 R55 R56 R57 R58 R59 R60 R61 R62 R63: library part RC0603, "RC0603"
REP1 REP2: library part REPER1.2, "REPER1.2"
VD3 VD4 VD5 VD12 VD14: library part SMBJ, "SMBJ"
VD10: "TVS for CAN"
VD13 VD15: library part BZV55C12, "Zener Voltage Regulator Diode"
  VD15: ComponentField6="Pin 2 is not connected and not drawn.", ComponentField7="Published 29-Sep-2000", OriginalName=BXV55C39
VD16: "Schottky Rectifier"
VT1 VT2 VT3 VT4 VT5 VT6 VT7 VT8 VT9 VT12 VT13 VT14: library part BC846BLT1, "NPN 500ma transistor", ComponentField7="Published 29-Sep-2000", OriginalName=BC846BLT1
VT10: "HEXFET Power MOSFET", ComponentField7="Published 8-Jun-2000", OriginalName=IRLML5103
VT11: library part BC857B, "PNP 100ma transistor", ComponentField7="Published 29-Sep-2000", OriginalName=BC846BLT1
XP13: "PLD06"

## Free pads (board coordinates)
  round 6 hole 3 unplated mask+0.05: 0(91.113,38.777)
  round 6 hole 3 mask+0.05: 0(91.113,113.777)

## Via types
v1: diameter 0.6, hole 0.3, Top Layer to Bottom Layer, tented both sides, 300 vias
v2: diameter 1, hole 0.5, Top Layer to Bottom Layer, tented both sides, 32 vias

## Nets (pads, with @x,y where several pads share a name; then routed paths per layer and width w, separated by ;. In a path a pad name is that pad's centre, name@x,y a point inside that pad or via, vN(x,y) a via of type N, cw(c..) or ccw(c..) an arc to the next point about the centre after c; other vN are vias at no path point)
+3V3: C11.2 C23.1 C24.2 C32.2 DA3.5 DD2.3 DD2.7 DD2.8 L2.1 R15.1 R16.1 R18.2 R19.2 R24.2 R25.2 R30.2 R31.2 R36.1 R37.1 R38.1 R39.1 R49.2 R57.1 R58.2 R59.2 R60.2 R62.2 R63.2 | length 217.1
  Top Layer w0.5: 90.65,61.5 R49.2@90.65,60.824 92.176,60.824 92.775,60.225 92.775,57.269 91.5,55.993 91.5,54.15 v1(91.525,54.125) ; R58.2@91.299,122.4 92.701,122.4 R60.2@92.726,122.425 92.726,123.153 92.9,123.327 95.173,123.327 95.875,122.625 95.875,119.8 97.6,118.075 v1(97.6,109.825) ; R63.2@92.451,43.275 v1(92.45,44.825) ; 92.676,45.101 R62.2@93.6,45.101 ; R18.2@96.124,99.875 96.124,99.301 96.425,99 R19.2@97.551,99 97.551,97.601 97.3,97.35 101.6,97.35 103.975,94.975 106.725,94.975 106.949,95.199 R30.2@106.949,96.05 ; R16.1@96.325,82.3 96.875,82.3 97.525,81.65 R15.1@97.525,80.425 ; v1(99.325,81.575) 99.975,82.225 102.125,82.225 102.475,82.575 ; DD2.3@100.257,89.705 103.705,89.705 ; 103.8,83.775 103.705,83.87 103.705,89.705 ; R31.2@106.651,97.7 106.651,97.049 106.949,96.751 R30.2@106.949,96.05 ; DD2.7@107.75,90.975 105.725,90.975 ; C11.2@109.975,91.275 109.975,91.875 109.605,92.245 DD2.8@107.75,92.245 106.22,92.245 105.725,91.75 105.725,90.975 ; R25.2@121.774,96.4 121.774,95.724 121.55,95.5 118.278,95.5 ; v1(130.025,89.025) 129.209,89.025 127.684,90.55 123.228,90.55 118.278,95.5 ; v1(132.675,97.775) 132.675,98.7 135,101.025 R57.1@135,104.9 ; v1(132.925,89.025) 133.175,88.775 R39.1@133.175,86.625 R38.1@133.175,85.025 R37.1@133.175,83.425 R36.1@133.175,81.8 ; v1(137.4,102.675) 137.925,102.675 138.451,103.201 R59.2@138.451,104.3 ; 103.705,89.705 104.975,90.975 105.725,90.975 ; R30.2@106.949,96.05 109.075,96.05 109.624,95.501 R24.2@113.8,95.501 118.278,95.5
  Top Layer w0.6: C32.2@105.85,76.3 L2.1@107.376,76.3
  Top Layer w0.8: 102.475,76.3 C32.2@105.85,76.3
  Top Layer w1: 91.075,62.15 90.95,62.275 C24.2@90.95,64.2 90.95,67.925 91.875,68.85 95.025,68.85 102.475,76.3 102.475,82.575 103.7,83.8 103.7,84.925 102.65,84.925 100.85,86.725 98.85,86.725 97.3,88.275 97.3,97.35
  Bottom Layer w0.5: v1(91.525,54.125) 91.525,45.75 v1(92.45,44.825) ; v1(96.875,98.975) 96.125,98.975 94.15,100.95 94.15,103.475 94.7,104.025 94.7,107.95 94.05,108.6 94.05,109.7 94.65,110.3 97.125,110.3 v1(97.6,109.825) ; v1(97.55,81.575) v1(99.325,81.575) ; v1(130.025,89.025) 132.1,89.025 ; v1(132.675,97.775) 132.2,97.301 132.2,89.125 132.1,89.025 ; v1(132.925,89.025) 132.1,89.025 ; v1(134.975,102.675) v1(137.4,102.675)
+3V3_F: C6.1 C7.2 C9.2 C31.2 DD1.8 DD1.17 DD1.44 L2.2 | length 38.3
  Top Layer w0.25: C7.2@111.425,78.475 111.425,81.025 v1(111.975,81.575) 112.175,81.775 DD1.8@114.1,81.775 ; C9.2@116.9,75.325 116.9,75.8 v1(117.375,76.275) 117.55,76.45 DD1.17@117.55,78.325 ; DD1.44@117.55,86.725 117.55,87.825 v1(118.025,88.3)
  Top Layer w0.5: v1(118.025,88.3) C6.1@118.025,89.6
  Top Layer w0.6: L2.2@108.925,76.3 C31.2@110.45,76.3 ; 110.45,77.1 C31.2@110.45,76.3 ; v1(111.75,75.675) 111.7,75.725 v1(111.7,76.375) 111.625,76.3 C31.2@110.45,76.3
  Top Layer w1: v2(114.075,86.2) v2@114.075,88.3
  Bottom Layer w1: v1(111.45,77.175) 111.45,81.05 v1(111.975,81.575) 114.075,83.675 v2(114.075,86.2) ; v1(111.7,76.375) 111.65,76.375 111.65,76.275 v1(117.375,76.275) ; v2(114.1,88.3) 117.925,88.3 117.975,88.35 v1(118.025,88.3)
+5V: C3.1 C8.2 C17.1 C18.1 DA1.4 DD1.20 K1.1 K2.1 K3.1 L1.2 R2.2 R3.2 R5.2 R45.2 VD17.2 VD19.2 VD20.2 XP2.9 XP10.2 XP14.3 | length 256.5
  Top Layer w0.25: DA1.4@86.375,47.7 87.325,47.7 C3.1@88.15,46.875 ; DD1.20@119.05,78.325 119.05,76.65 C8.2@120.05,75.65
  Top Layer w0.5: K1.1@80.2,82.7 84.4,82.7 85.1,82 VD17.2@85.1,80.451 ; K2.1@80.2,93.7 84.1,93.7 85.1,92.7 VD19.2@85.1,91.551 ; K3.1@80.2,104.7 84.1,104.7 85.1,103.7 VD20.2@85.1,102.451 ; R3.2@89.849,53.05 91.3,53.05 92.2,52.15 ; R2.2@90.849,49.45 92.075,49.45 92.2,49.575 ; R5.2@90.849,51.075 92.125,51.075 92.2,51.15 ; R45.2@121.824,64.675 121.824,66.174 v1(121.85,66.2) ; v2(121.925,69.1) 122.4,68.625 127.15,68.625 128.025,67.75 128.025,65.264 128.675,64.614 128.675,62.75 128.475,62.55 v1(128.475,62.425) ; v1(131.375,63.425) 131.375,64.35 131.975,64.95 132.036,64.95 132.236,65.15 143.025,65.15 144.25,66.375 v2(144.25,71.175) ; XP14.3@137.36,120.1 137.36,120.76 138.525,121.925 143.325,121.925 v2@145.5,119.75
  Top Layer w0.8: C3.1@88.15,46.875 90.35,46.875 91.175,47.7 ; 106.825,64.6 110.525,68.3 115.825,68.3 116.963,69.438 ; v2(118.375,70.85) 116.963,69.438 ; C8.2@120.05,75.65 120.05,72.55 v2(120.075,72.525) ; v2(121.925,69.1) 121.587,69.438 116.963,69.438
  Top Layer w1: VD17.2@85.1,80.451 86.899,80.451 v2(86.9,80.45) ; VD19.2@85.1,91.551 85.126,91.525 v2(86.8,91.525) ; VD20.2@85.1,102.451 VD20.2@85.1,102.451 v2(86.85,102.45) ; 91.175,47.7 92.2,48.725 92.2,49.575 92.2,51.15 92.2,52.15 93.525,53.475 ; v2(92.325,67.425) 92.775,67.425 94.25,65.95 94.25,57.4 92.65,55.8 92.65,54.35 93.525,53.475 ; 100.325,55.55 98.425,53.65 98.425,53.475 ; XP10.2@102.825,37.2 102.825,40.45 98.425,44.85 98.425,53.475 ; 93.525,53.475 98.425,53.475
  Bottom Layer w0.5: v2(86.85,102.45) 86.8,102.4 v2(86.8,91.525) 86.325,91.05 86.325,81.025 v2(86.9,80.45) ; v1(121.85,66.2) 121.85,69.025 v2(121.925,69.1) ; v1(128.475,62.425) 129.475,63.425 v1(131.375,63.425) ; XP2.9@140.135,86.335 141.445,85.025 145.457,85.025 ; v2(144.25,71.175) 145.457,72.382 145.457,85.025 ; v2(145.457,119.606) 145.457,85.025
  Bottom Layer w0.8: v2(118.375,70.85) 118.4,70.85 v2(120.075,72.525)
  Bottom Layer w1: v2(86.9,80.45) 85.825,79.375 85.825,72.525 88.225,70.125 89.419,70.125 92.119,67.425 v2(92.325,67.425)
BL_7SEG: DD1.31 R41.1 | length 69.8
  Top Layer w0.2: v1(97.25,54.775) 97.25,64.05 102.375,69.175 115.075,69.175 116.8,70.9 v1(116.925,70.9) ; v1(99.65,52.4) 101.55,50.5 104.75,50.5 105.35,51.1 R41.1@106.7,51.1 ; v1(120.775,71.625) 122.975,73.825 122.975,74.73 124.37,76.125 125.425,76.125 126.95,77.65 v1(127.075,77.65) ; DD1.31@122.5,82.775 127.9,82.775 v1(128.225,83.1)
  Bottom Layer w0.2: v1(97.25,54.775) 97.175,54.85 97.175,54.875 v1(99.65,52.4) ; v1(116.925,70.9) 117.875,69.95 118.725,69.95 119.475,70.7 119.525,70.7 120.45,71.625 v1(120.775,71.625) ; v1(127.075,77.65) 127.075,79.225 126.9,79.4 126.9,81.925 128.075,83.1 v1(128.225,83.1)
BL_KB: DD1.25 R35.1 | length 17.1
  Top Layer w0.2: DD1.25@122.5,79.775 124.075,79.775 124.275,79.575 129.584,79.575 131.034,78.125 136.05,78.125 137.15,77.025 R35.1@138.45,77.025
CANH: DD1.19 FU3.1 | length 14.1
  Top Layer w0.2: DD1.19@118.55,78.325 118.55,72.566 120.366,70.75 121.125,70.75 124.375,74 FU3.1@124.75,74
CANH_F: FU3.2 VD10.2 XP4.1 | length 46.4
  Top Layer w0.6: VD10.2@124.4,44.8 128.225,44.8 128.85,45.425 v1(129.8,45.425) 129.8,44.948 130.875,43.873 130.875,40.375 XP4.1@127.7,37.2 ; FU3.2@127.95,74 128,73.95 129.275,73.95 129.475,73.75 v1(129.475,71.925) ; v1(128.65,68.725) 128.775,68.6 128.775,65.575 129.425,64.925 v1(129.425,62.15)
  Bottom Layer w0.6: v1(128.65,68.725) 128.65,71.1 v1(129.475,71.925) ; v1(129.425,62.15) 129.8,61.775 v1(129.8,45.425)
CANL: DD1.18 FU4.1 | length 13.5
  Top Layer w0.2: DD1.18@118.05,78.325 118.05,72.5 120.25,70.3 121.5,70.3 122.025,70.825 124.6,70.825 FU4.1@124.625,70.8
CANL_F: FU4.2 VD10.1 XP4.2 | length 43.5
  Top Layer w0.5: VD10.1@124.4,46.832 127.668,46.832 128.125,46.375 130.45,46.375 130.775,46.05 v1(130.775,45.575) v1@130.775,45.375
  Top Layer w0.7: FU4.2@127.95,70.8 129.2,70.8 129.625,70.375 129.625,65.927 130.275,65.277 130.275,62.875 v1(130.7,62.45) ; v1@130.775,45.375 131.95,44.2 131.95,37.95 XP4.2@132.7,37.2
  Bottom Layer w0.7: v1(130.7,62.45) 130.675,62.425 130.775,62.325 v1(130.775,45.575)
COUNTER_1: DD1.45 R18.1 VT1.3 | length 36.1
  Top Layer w0.2: R18.1@94.575,99.875 94.575,98.9 95.325,98.15 v1(96.325,98.15) ; v1(100.575,98.3) 101.8,98.3 v1(102.5,97.6) ; v1(102.475,95.325) 102.5,95.3 102.5,94.55 102.775,94.275 114.575,94.275 117.05,91.8 DD1.45@117.05,86.725
  Top Layer w0.5: VT1.3@92.109,99.264 93.064,99.264 93.675,99.875 R18.1@94.575,99.875
  Bottom Layer w0.2: v1(96.325,98.15) 100.425,98.15 v1(100.575,98.3) ; v1(102.475,95.325) 102.475,97.575 v1(102.5,97.6)
COUNTER_2: DD1.33 R30.1 VT5.3 | length 39.6
  Top Layer w0.2: VT5.3@104.075,97.05 105.3,97.05 v1(105.4,97.15) R30.1@105.4,96.05 ; v1(107.975,95.025) 108.325,94.675 118.325,94.675 121.95,91.05 v1(121.95,90.7) ; v1(122.425,88.575) 122.65,88.8 126.959,88.8 128.2,87.559 v1(128.2,86.675) ; DD1.33@122.5,83.775 127.225,83.775 128.225,84.775 v1(128.225,85.375)
  Bottom Layer w0.2: v1(105.4,97.15) 105.85,97.15 v1(107.975,95.025) ; v1(121.95,90.7) 121.925,90.675 121.925,89.075 v1(122.425,88.575) ; v1(128.2,86.675) 128.225,86.65 v1(128.225,85.375)
EARTH: pad.0@91.113,113.777 XP5.3 XP18.2 | length 184.7
  Top Layer w2: XP5.3@67.5,37.4 67.5,40.1 70.25,42.85 70.25,61.2 78.875,69.825 81.675,69.825 84.1,72.25 84.1,73.395
  Bottom Layer w2: XP18.2@55.375,115.125 55.375,118.398 cw(c57.915,118.398) 56.119,120.194 57.758,121.833 cw(c59.554,120.037) 59.554,122.577 86.846,122.577 cw(c86.846,120.037) 88.642,121.833 90.369,120.106 cw(c88.573,118.31) 91.113,118.31 pad.0@91.113,113.777 ccw(c91.113,111.759) 89.686,113.186 83.4,106.9 83.4,71.75 82.175,70.525 72.25,70.525 67.5,65.775 XP5.3@67.5,37.4
  other v1: 82.3,71.075 83.175,71.225
GND: C1.2 C2.2 C3.2 C4.1 C5.2 C6.2 C7.1 C8.1 C9.1 C11.1 C12.1 C13.1 C14.1 C15.1 C17.2 C18.2 C19.2 C20.2 C21.2 C22.2 C23.2 C24.1 C25.1 C26.2 C27.1 C28.1 C29.1 C30.1 C31.1 C32.1 DA1.11 DA1.19 DA1.20 DA1.21 DA2.9 DA2.11 DA3.2 DD1.5 DD1.21 DD1.41 DD2.4 J1.2 J2.2 J3.1 R1.2 R4.2 R6.2 R7.2 R13.1 R14.1 R23.1 R28.1 R34.1 R44.1 R47.1 R48.1 R50.1 VD1.2 VD2.2 VD3.1 VD4.1 VD5.1 VD10.3 VD12.1 VD14.1 VD15.1 VD16.1 VD18.2 VD21.2 VD22.2 VD26.2 VT1.2 VT2.2 VT3.2 VT4.2 VT5.2 VT6.2 VT7.2 VT8.2 VT9.2 VT12.2 VT13.2 VT14.2 XP1.1 XP3.2 XP10.1 XP11.2 XP13.5 XP17.2 | length 23.5
  Top Layer w0.25: 82.175,46 82.2,46.025 82.2,46.6 82.3,46.7 DA1.19@82.975,46.7 ; 83.8,45.45 83.925,45.575 DA1.20@83.925,46.25 ; DA1.11@83.925,50.65 83.925,51.325 84,51.4 ; DD1.5@114.1,83.275 116.15,83.275 v1(116.175,83.25) ; v1(117.075,61.4) 117.25,61.575 DA2.9@117.25,63.025 ; DD1.41@119.05,86.725 119.05,85.15 v1(119.1,85.1) ; v1(119.525,79.9) 119.55,79.875 DD1.21@119.55,78.325 119.55,77.075 120.05,76.575 121.325,76.575 121.75,76.15 C8.1@121.75,75.65 122.175,75.65 v1(122.8,76.275)
  Top Layer w0.5: R4.2@84.549,52.65 R7.2@84.549,54.3 84.925,54.3 85.349,54.724 ; DA3.2@85.925,60.95 v2(87,60.95) 87.05,60.9 87.05,58.675 86.85,58.475 ; v2(125.25,45.825) 126.702,45.825 VD10.3@126.711,45.816
  other v1: 103.25,32.55 97.05,32.725 92.775,33.075 112.975,33.075 118.925,33.075 108.45,33.6 71.375,33.625 71.35,36.175 71.35,38.575 103.875,43.3 81.1,43.375 77.875,43.725 79.375,44.525 82.6,44.678 86.945,44.8 86.725,45.6 134.55,46.275 132.525,46.375 77.425,47.15 84.025,47.4 85.325,47.4 110.227,47.6 137.675,48.275 84.675,48.45 84.025,49.4 85.325,49.4 107.925,49.45 141.1,49.525 110.9,50.2 139.35,50.3 135.8,50.325 104.05,51.525 84.388,51.6 135.175,52.15 105.15,53.225 111.05,53.225 113.475,53.7 90.45,54.9 113.85,55.25 87.775,55.275 98.475,55.55 85.8,55.925 114,56.525 90.2,56.7 98.6,57.1 77.125,58.275 86.4,58.275 99.1,58.65 100,59.55 101.275,59.925 117.075,60.225 118.525,60.225 132.65,60.525 117.75,60.825 134.35,60.9 135.5,60.9 122.875,60.925 101.925,61.025 118.525,61.4 144.6,62.25 102.1,62.5 143.025,62.6 92.675,62.7 124.025,63.05 98.4,63.25 80.75,63.475 102.75,63.55 84.7,64.15 86.8,64.325 103.675,64.55 131.725,65.7 92.375,65.725 105.025,65.775 125.4,65.85 101.65,66.25 106.45,66.375 96.475,66.875 89.35,66.975 143.125,67.075 116.4,67.1 117.8,67.225 107.85,67.5 117.1,67.65 118,68.075 108.925,68.35 98.6,68.75 114.756,70.8 116.4,72.528 134.875,73.6 87.609,73.8 102.75,74.35 109.175,74.55 107.125,74.6 98.225,74.625 104.625,74.65 91.85,75.7 129.45,76.05 127.2,76.3 88.475,77.35 105.575,78 123,78.125 108.4,78.191 88.225,78.35 122.15,78.675 144,78.675 88.25,80.05 144,80.2 138.35,80.925 95.5,80.975 92.2,81.3 105.425,82.4 118.625,82.4 108.075,82.5 109.275,82.525 110.35,82.525 130.275,83.15 111.725,83.7 144,83.7 96.65,86 88.55,86.075 123.2,86.45 88.675,87.025 102.403,87.2 102.275,88.575 111.35,89.7 119.137,91.2 125.8,94 123.65,94.575 125.225,95.4 89.725,95.775 128.15,96.05 110.075,97.1 111.85,97.25 88.825,97.5 101.775,99.625 141.975,100.05 99.125,100.475 113.05,100.7 103.05,100.925 115.125,101 89.775,101.55 106.75,102.05 119.175,102.225 104.55,102.55 122.675,103.825 108.575,103.925 104.55,104.75 117.925,105.1 106.675,105.875 93.775,105.975
  other v2: 126.7,34.5 130,34.5 132.15,34.75 134.5,34.85 134.8,39.75 82.175,40.1 133.8,41.775 96.525,41.9 133.475,44 133.15,45.375 119.25,107.525 113.925,109.825
IMP_C_1: R21.1 VD3.2 XP9.2 XP15.1 | length 67
  Top Layer w0.5: VD3.2@96.375,105.95 98.125,105.95 ; R21.1@98.35,105.1 98.35,105.725 98.125,105.95 ; v2(130.8,122.15) 130.75,122.15 129.673,123.227 109.052,123.227 XP9.2@100.875,115.05 100.875,108.7 98.125,105.95
  Bottom Layer w0.5: v2(130.8,122.15) 130.8,122.056 130.95,121.906 130.95,118.8 132.5,117.25 132.5,115.2 133.775,113.925 142.34,113.925 XP15.1@143.99,115.575
IMP_C_2: R33.1 VD5.2 XP9.1 XP15.4 | length 55.3
  Top Layer w0.5: R33.1@113.25,103.875 VD5.2@111.275,103.875 111.275,107.45 105.875,112.85 XP9.1@105.875,115.05 105.875,117.25 111.052,122.427 128.973,122.427 v2(131.9,119.5)
  Bottom Layer w0.5: v2(131.9,119.5) 133.2,118.2 133.2,115.5 133.75,114.95 135.745,114.95 XP15.4@136.37,115.575 XP15.4@136.37,115.699
IMPULSE_OUT: FU5.2 XP8.1 | length 9
  Top Layer w1: FU5.2@131.35,68.175 133.95,68.175 134.925,67.2 XP8.1@139.925,67.2
ISP_START: DD1.4 J2.1 R16.2 | length 24.5
  Top Layer w0.2: J2.1@94.74,84.7 97.825,84.7 98.55,83.975 v1(102.05,83.975) ; v1(104.7,85.2) 104.7,85.525 105.275,86.1 111.2,86.1 111.375,85.925 111.375,85.178 112.778,83.775 DD1.4@114.1,83.775
  Top Layer w0.5: J2.1@94.74,84.7 94.776,84.664 R16.2@94.776,82.3
  Bottom Layer w0.2: v1(102.05,83.975) 103.475,83.975 v1(104.7,85.2)
L_FLOW_VALVE_RELAY: DD1.12 R53.1 R55.1 | length 90.8
  Top Layer w0.2: v1(92.1,70.325) 93.25,70.325 93.875,70.95 v1(95.5,70.95) ; v1(100.1,70.9) 100.989,70.9 102.064,71.975 111.916,71.975 114.35,74.409 114.35,78.975 114.575,79.2 115.075,79.2 115.225,79.35 115.225,79.6 115.05,79.775 DD1.12@114.1,79.775
  Top Layer w0.5: R55.1@77.5,38.475 76.875,38.475 72.875,42.475 72.875,59.785 80.34,67.25 85.675,67.25 v1(89.6,71.175) 89.6,80.6 88.824,81.376 R53.1@88.824,82.7
  Bottom Layer w0.2: v1(89.6,71.175) 89.6,71.075 90.35,70.325 v1(92.1,70.325) ; v1(95.5,70.95) 95.55,70.9 v1(100.1,70.9)
L_IN: F1.1 XP5.1
LED_ERROR: DD1.10 R8.2 | length 65
  Top Layer w0.2: R8.2@84,37.874 84,39.225 84.5,39.725 v1(85.425,39.725) ; v1(86.775,39.2) 86.775,39.909 91.325,44.459 91.325,46.034 93.475,48.184 93.475,51.025 v1(94.7,52.25) ; v1(94.705,55.103) 94.725,55.123 94.725,55.55 95.45,56.275 95.45,67.359 100.866,72.775 111.525,72.775 113.55,74.8 113.55,77.666 112.75,78.466 112.75,80.45 113.075,80.775 DD1.10@114.1,80.775
  Top Layer w0.25: DD1.10@114.1,80.775 DD1.10@114.125,80.75
  Bottom Layer w0.2: v1(85.425,39.725) 86.05,39.725 86.575,39.2 v1(86.775,39.2) ; v1(94.7,52.25) 94.705,52.255 v1(94.705,55.103)
LED_STATE: DD1.9 R9.2 | length 62.8
  Top Layer w0.2: R9.2@85.6,37.874 85.6,38.775 86.025,39.2 86.025,39.725 90.925,44.625 90.925,46.2 93.075,48.35 93.075,51.5 v1(93.8,52.225) ; v1(94.025,54.625) 94.025,55.825 95.05,56.85 95.05,67.525 100.7,73.175 111.359,73.175 113.15,74.966 113.15,77.5 112.35,78.3 112.35,80.616 113.009,81.275 DD1.9@114.1,81.275
  Bottom Layer w0.2: v1(93.8,52.225) 94.025,52.45 v1(94.025,54.625)
LFL_L: K3.11 XP7.2 | length 13.7
  Bottom Layer w3: K3.11@58.1,104.7 ccw(c58.1,106.631) 59.466,105.266 64.631,110.431 ccw(c62.835,112.227) 65.375,112.227 XP7.2@65.375,115.125
M/S: DD1.48 J3.2 R57.2 | length 50
  Top Layer w0.2: v1(113.075,89.625) 113.7,90.25 v1(113.7,91.55) ; v1(115,89.625) 115.55,89.075 DD1.48@115.55,86.725 ; v1(116.05,93.725) 116.25,93.925 v1(118.075,93.925) ; v1(120.55,94.314) 120.55,94.006 123.456,91.1 128.425,91.1 v1(129.7,89.825)
  Top Layer w0.5: v1(133.55,98.05) 136.549,101.049 R57.2@136.549,104.9 136.549,106.376 J3.2@135.375,107.55
  Bottom Layer w0.2: v1(113.075,89.625) v1(115,89.625) ; v1(113.7,91.55) 113.7,91.575 114.3,92.175 114.925,92.175 116.05,93.3 v1(116.05,93.725) ; v1(118.075,93.925) 118.464,94.314 v1(120.55,94.314)
  Bottom Layer w0.5: v1(129.7,89.825) 130.85,89.825 131.325,90.3 131.325,97.75 132.225,98.65 132.95,98.65 v1(133.55,98.05)